# Altium PCB bldc_driver.PcbDoc
Units mm, origin at the board's own origin, x right, y up, seen from the top; angles counter-clockwise.
Board outline 60 x 50 mm, 2 copper layers (Top Layer, Bottom Layer); 14 components, 13 nets, 51 pads, 66 vias.
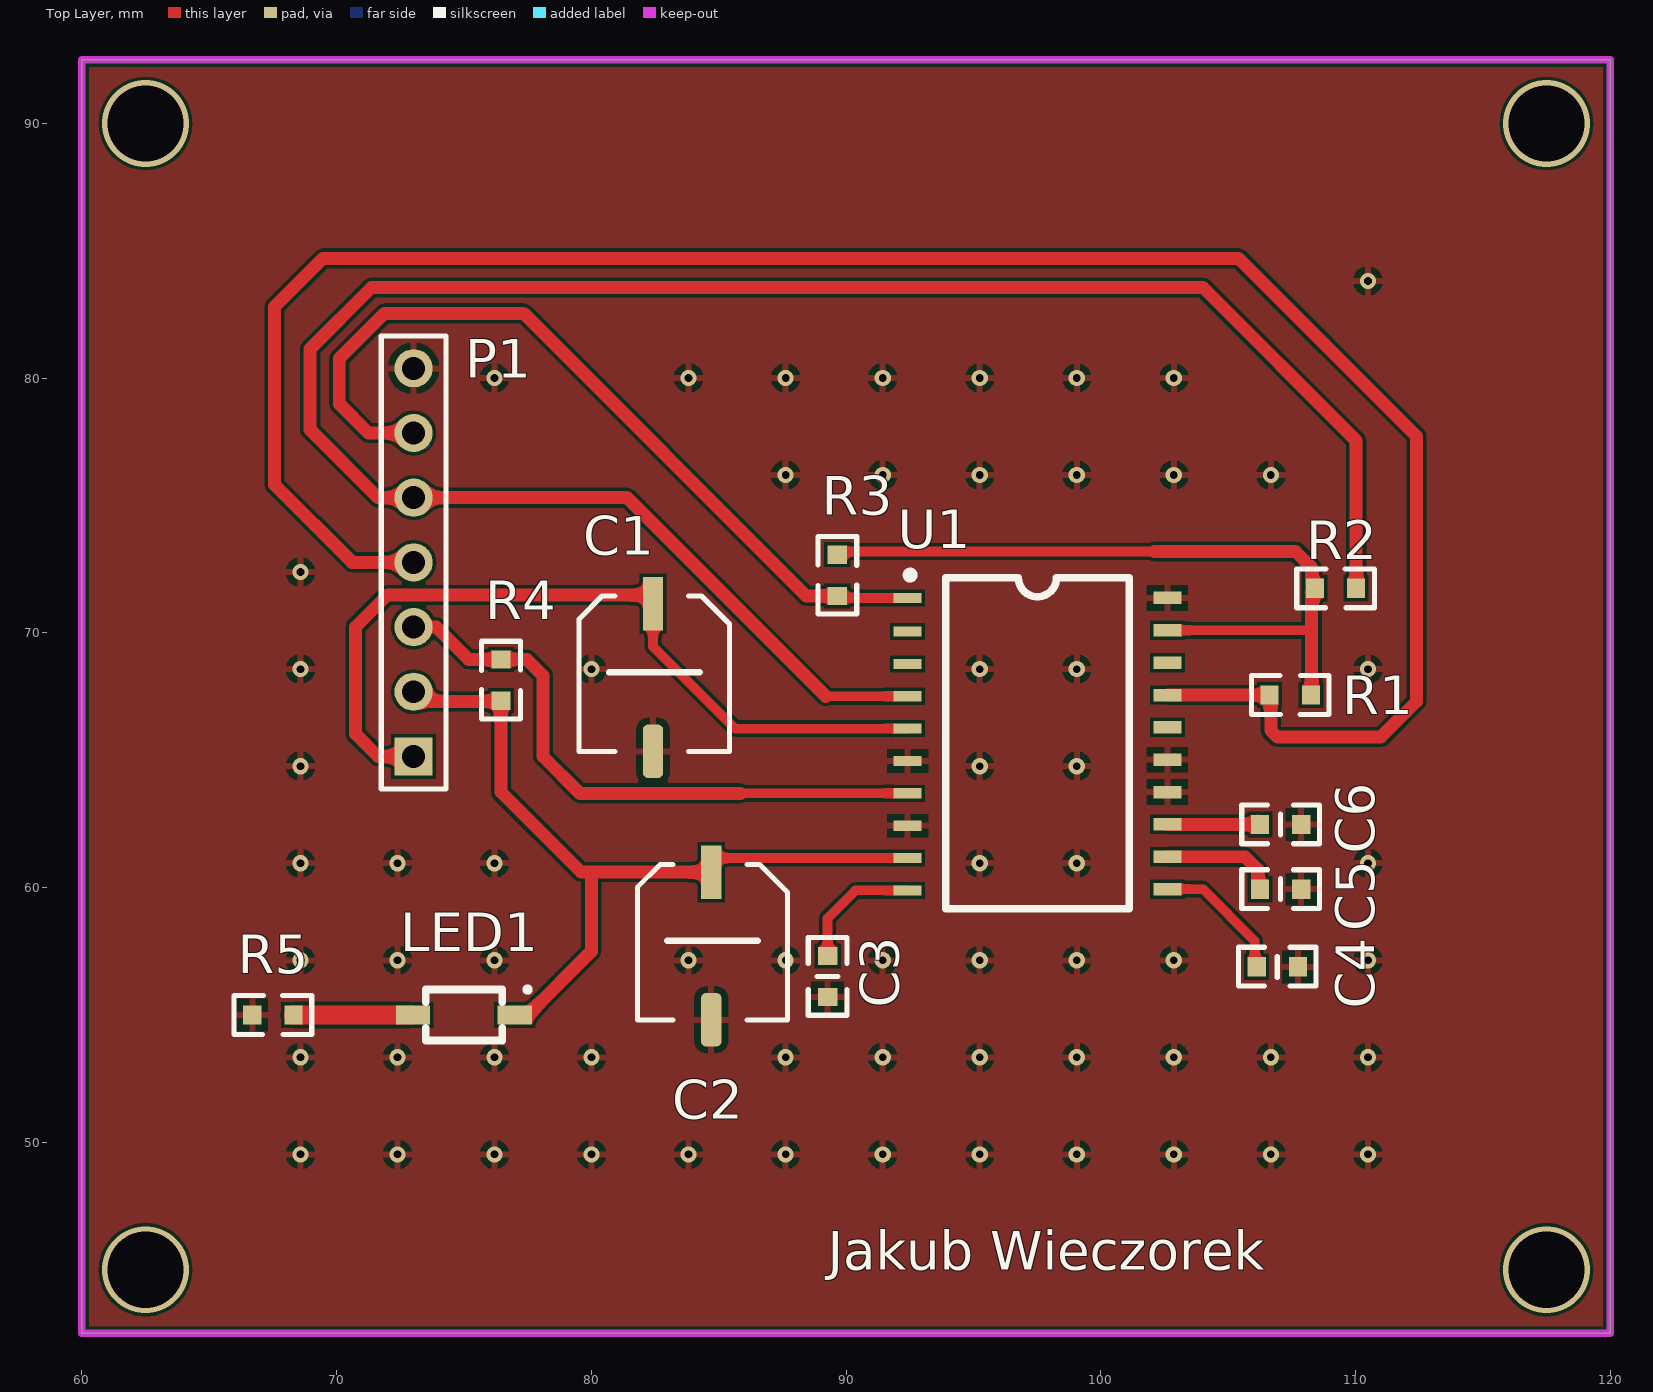
[diagram p0: Top Layer view]
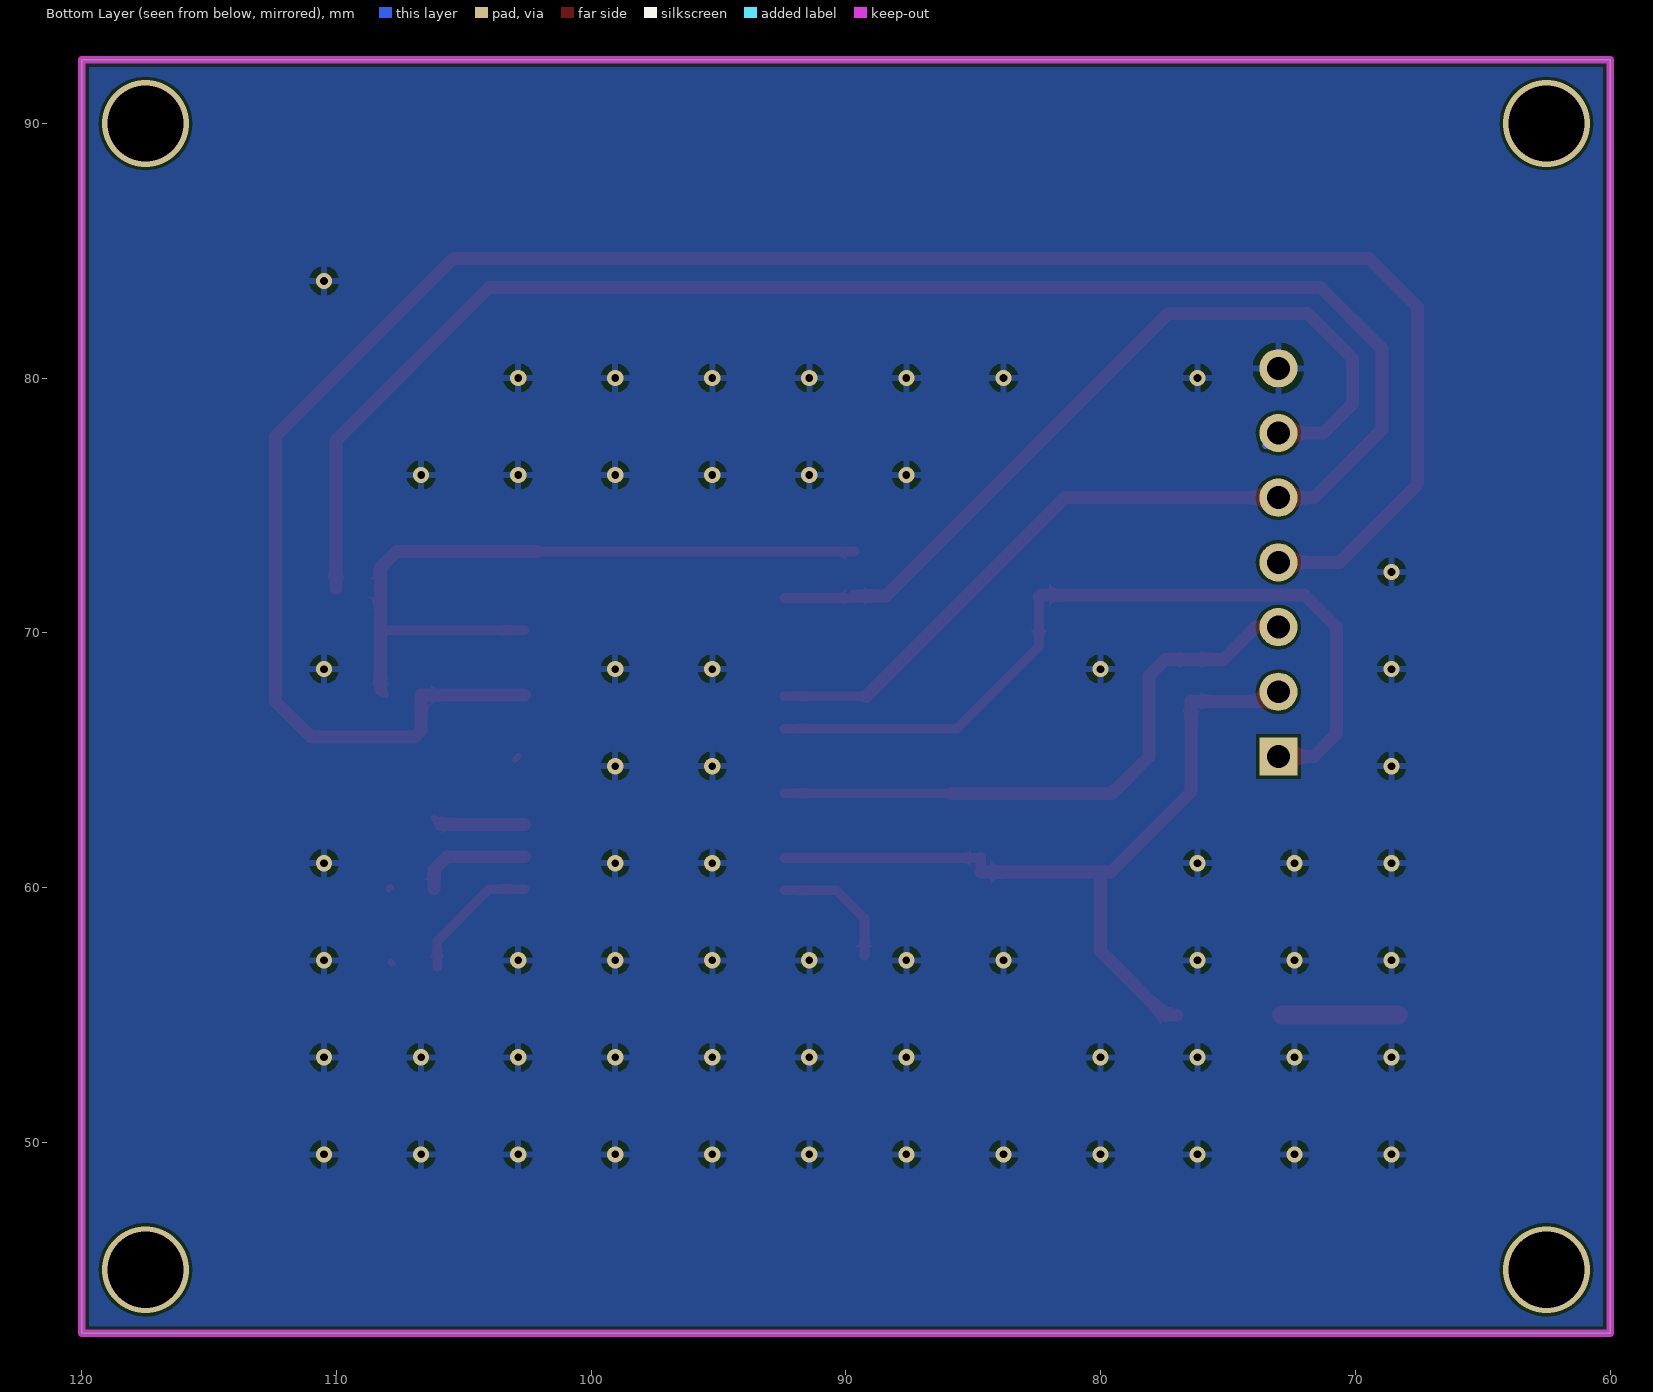
[diagram p1: Bottom Layer view, seen from below]
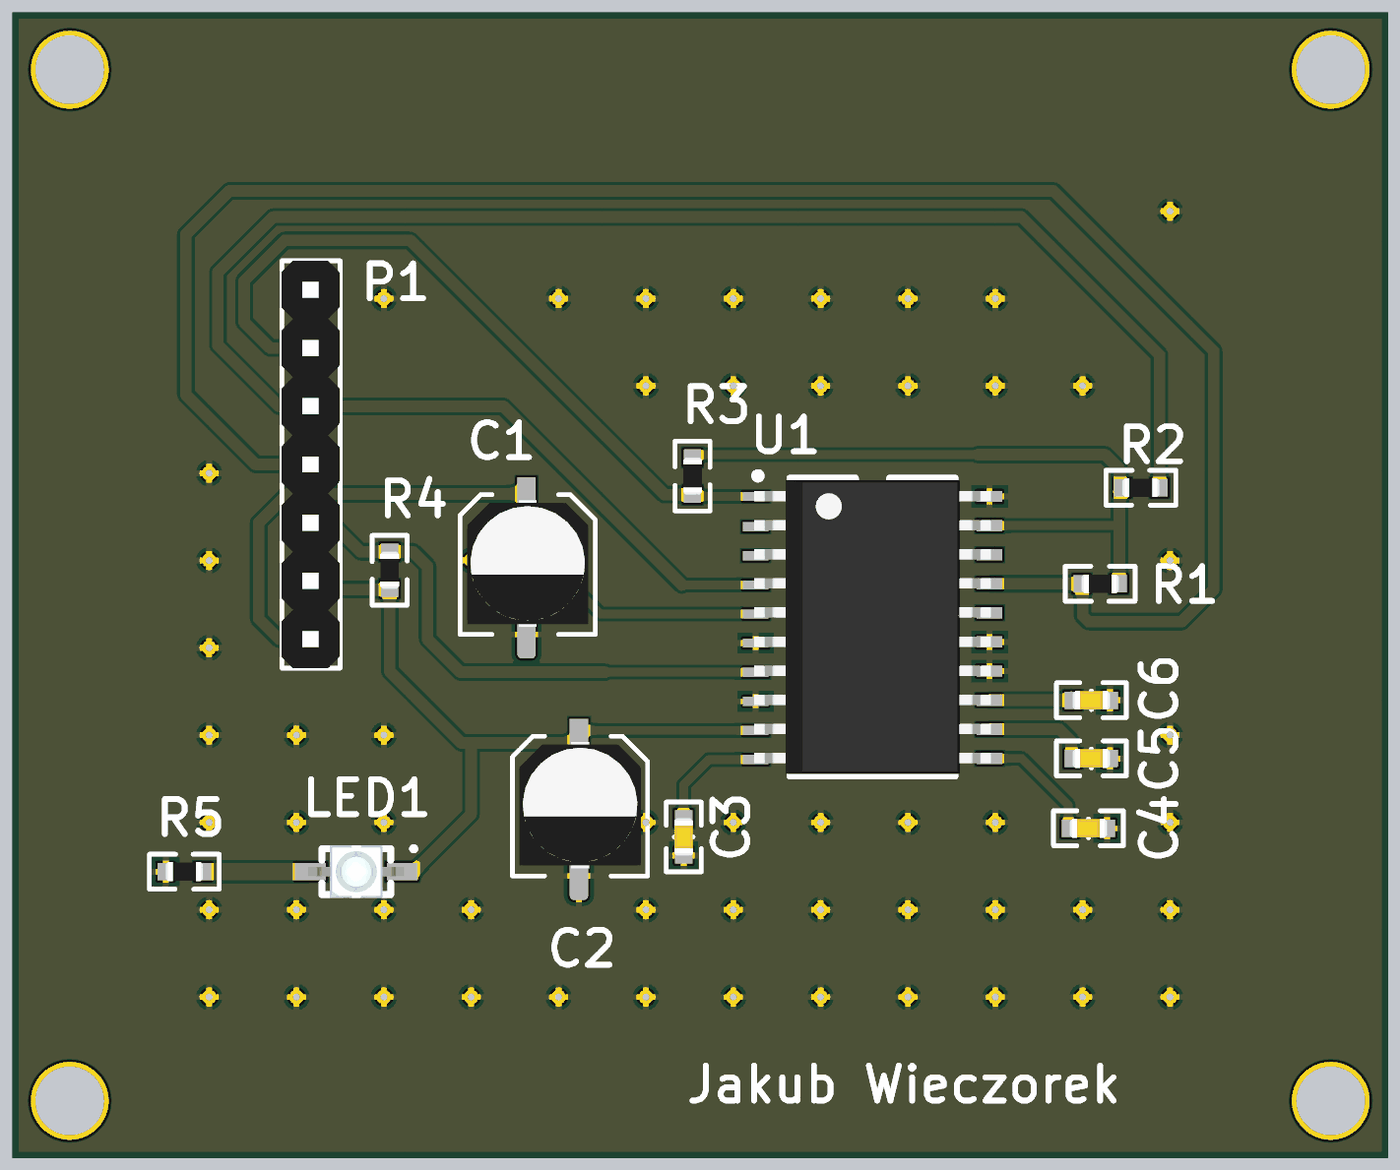
[diagram p2: 3D render of the assembled board from above, using the file's embedded part models]

## Layer stack, top to bottom
Top Solder: solder mask 0.0102, Solder Resist, Dk 3.5
Top Layer: signal copper 0.0356
Dielectric 1: dielectric 0.32, FR-4, Dk 4.8
Bottom Layer: signal copper 0.0356
Bottom Solder: solder mask 0.0102, Solder Resist, Dk 3.5

## Board outline
60,42.5 60,92.5 120,92.5 120,42.5

## Design rules (kind name [scope] priority, off if disabled: settings)
Clearance minimum_clearance [All] p1: gap=0.127 ignorepadtopadclearanceinfootprint=FALSE // minimum electrical clearance
DiffPairsRouting [All] p1: maxlimit=2.54 minlimit=0.127 mostfreqgap=0.254 toplayer_minwidth=0.127 toplayer_maxwidth=2.54 toplayer_prefwidth=0.762 bottomlayer_minwidth=0.127 bottomlayer_maxwidth=2.54 bottomlayer_prefwidth=0.762 maxuncoupledlength=12.7
HoleSize [All] p1: absolutevalues=TRUE maxlimit=6.5 minlimit=0.3 maxpercent=80.000 minpercent=20.000
MinimumAnnularRing [All] p1: minimumring=0.153
PolygonConnect [All] p1: connectstyle=Relief reliefconductorwidth=0.254 reliefentries=4 polygonreliefangle="90 Angle" airgapwidth=0.254
RoutingVias [All] p1: holewidth=1 width=1.45 viastyle="Through Hole" minholewidth=0.3 minwidth=0.45 maxholewidth=5 maxwidth=5.45
SilkToSilkClearance [All] p1: silktosilkclearance=0.125
SilkToSolderMaskClearance [IsPad] p1: minsilkscreentomaskgap=0.125 clearancetoexposedcopper=TRUE
SolderMaskExpansion [All] p1: expansion=0.102
UnRoutedNet [All] p1: checkbadconnections=TRUE
Width [All] p1: maxlimit=2.54 minlimit=0.127 preferedwidth=0.762 minimp=50.000000 maximp=50.000000 favimp=50.000000
25 further rules are at their usual default settings.

## Components (designator, comment, footprint, x,y, rotation, side; value= is the part's Value field where it differs from the comment)
C1 "10uF" Con_SMD_5x5.5 82.423,68.453 r0 top
C2 "10uF" Con_SMD_5x5.5 84.709,57.912 r0 top
C3 "Cap" 0603_CAP 89.281,56.515 r90 top value=18nF
C4 "Cap" 0603_CAP 106.934,56.896 r180 top value=18nF
C5 "Cap" 0603_CAP 107.061,59.944 r180 top value=200nF
C6 "Cap" 0603_CAP 107.061,62.484 r180 top value=10nF
LED1 "RED" VSMB2020X01 75,55 r180 top
P1 "HDR1X7" HDR1X7 73.025,65.151 r90 top
R1 "47k" 0603_RES 107.442,67.564 r180 top
R2 "47k" 0603_RES 109.22,71.755 r0 top
R3 "47k" 0603_RES 89.662,72.263 r270 top
R4 "10k" 0603_RES 76.454,68.151 r90 top
R5 "100" 0603_RES 67.5,55 r0 top
U1 "TDA5144AT" SO20 97.516,65.674 r270 top

## Footprints (in the part's own frame and the unit in brackets; to place one, negate y for a bottom-side part, rotate by r counter-clockwise, add the part's x,y. Pads: shape width x height; smd on the part's side, far side on the other; paste and mask are expansions set on the pad)
0603_CAP [mil]
  rect 28x30 smd: 1(-31.89,0.14) 2(31.89,0.14)
  silkscreen extent -60,-30 60,30, body extent -32,-16 32,16, height 32
0603_RES [mil]
  rect 28x30 smd: 1(-31.89,0) 2(31.89,0)
  silkscreen extent -60,-30 60,30, body extent -32,-16 32,16, height 32
Con_SMD_5x5.5 [mm] "SMD electrolytic capacitor"
  rect 0.8x2.1 smd: 1(0,2.7)
  rrect50% 0.8x2.1 smd: 2(0,-3.1)
  silkscreen extent -2.9,-3.1 3,3, body extent -2.6,-2.76 2.7,2.76, height 5.81
HDR1X7 [mm] "Connector; Header; 7 Position"
  rect 1.5x1.5 hole 0.9: 1(0,0)
  round 1.5 hole 0.9: 2(2.54,0) 3(5.08,0) 4(7.62,0) 5(10.16,0) 6(12.7,0) 7(15.24,0)
  silkscreen extent -1.27,-1.27 16.51,1.27, body extent -1.27,-1.24 16.51,1.3, height 8.54
SO20 [mm] "Plastic small outline package; 20 leads; large body (SOT163-1; SO20L)."
  rect 0.4x1.1 smd: 1(-5.7,-5.1) 2(-4.38,-5.1) 3(-3.11,-5.1) 4(-1.84,-5.1) 5(-0.57,-5.1) 6(0.7,-5.1) 7(1.97,-5.1) 8(3.24,-5.1) 9(4.51,-5.1) 10(5.78,-5.1)
  rect 0.49x1.1 smd: 11(5.73,5.1) 12(4.46,5.1) 13(3.19,5.1) 14(1.92,5.1) 15(0.65,5.1) 16(-0.62,5.1) 17(-1.89,5.1) 18(-3.16,5.1) 19(-4.43,5.1) 20(-5.7,5.1)
  silkscreen extent -6.74,-5.14 6.5,3.6, body extent -6.41,-5.16 6.41,5.16, height 2.48
VSMB2020X01 [mm] "VSMB2000X01 series are infrared, 940 nm emitting diodes  in GaAlAs (DH)"
  rect 1.35x0.75 smd: 1(-2,0) 2(2,0)
  silkscreen extent -2.55,-1.05 1.5,1, body extent -2.1,-1.15 2.1,1.15, height 2.77

## Part data
C1 C2: library part Cap_Pol, "Polar capacitor"
C3 C4 C5 C6: "Ceramic capacitor"
LED1: library part LED, "Light-emitting diode", COLOR=RED
P1: "Header, 7-Pin", LatestRevisionDate=17-Jul-2002, LatestRevisionNote="Re-released for DXP Platform.", Publisher="Altium Limited"
R1 R2 R3 R4 R5: library part RES, "Resistior"
U1: library part driver_TDA5144AT, "driver TDA5144AT", ComponentLink1Description=TDA5144_data_scheet, ComponentLink1URL=.\data_sheets\TDA5144_data_sheet.pdf, ComponentLink2Description=SO-20, ComponentLink2URL=.\data_sheets\SOT163-1_data_sheet.pdf

## Via types
v1: diameter 0.635, hole 0.305, Top Layer to Bottom Layer, 62 vias
v2: diameter 3.4, hole 3, Top Layer to Bottom Layer, 4 vias

## Nets (pads, with @x,y where several pads share a name; then routed paths per layer and width w, separated by ;. In a path a pad name is that pad's centre, name@x,y a point inside that pad or via, vN(x,y) a via of type N, cw(c..) or ccw(c..) an arc to the next point about the centre after c; other vN are vias at no path point)
FG: P1.3 R4.2 U1.7 | length 24
  Top Layer w0.381: 85.85,63.704 U1.7
  Top Layer w0.508: P1.3 73.914,70.231 75.184,68.961 R4.2 77.47,68.961 78.105,68.326 78.105,65.151 79.552,63.704 85.85,63.704
GND: C1.2 C2.2 C3.1 C4.1 C5.1 C6.1 P1.7 R5.1 U1.6 U1.8 U1.14 U1.15 U1.20 | length 0.4
  Top Layer w0.254: U1.15@102.87,65.151 U1.15@102.997,65.024 ; C4.1@107.823,57.023 C4.1@107.871,57.071 ; C5.1@107.871,60.023 C5.1@107.95,59.944
  other v1: 68.58,49.53 72.39,49.53 76.2,49.53 80.01,49.53 83.82,49.53 87.63,49.53 91.44,49.53 95.25,49.53 99.06,49.53 102.87,49.53 106.68,49.53 110.49,49.53 68.58,53.34 72.39,53.34 76.2,53.34 80.01,53.34 87.63,53.34 91.44,53.34 95.25,53.34 99.06,53.34 102.87,53.34 106.68,53.34 110.49,53.34 68.58,57.15 72.39,57.15 76.2,57.15 83.82,57.15 87.63,57.15 91.44,57.15 95.25,57.15 99.06,57.15 102.87,57.15 110.49,57.15 68.58,60.96 72.39,60.96 76.2,60.96 95.25,60.96 99.06,60.96 110.49,60.96 68.58,64.77 95.25,64.77 99.06,64.77 68.58,68.58 80.01,68.58 95.25,68.58 99.06,68.58 110.49,68.58 68.58,72.39 87.63,76.2 91.44,76.2 95.25,76.2 99.06,76.2 102.87,76.2 106.68,76.2 76.2,80.01 83.82,80.01 87.63,80.01 91.44,80.01 95.25,80.01 99.06,80.01 102.87,80.01 110.49,83.82
MOT1: P1.6 R3.2 U1.1 | length 33.4
  Top Layer w0.381: R3.2@89.789,71.374 U1.1
  Top Layer w0.508: P1.6 71.247,77.851 70.104,78.994 70.104,80.772 71.882,82.55 77.343,82.55 88.44,71.453 R3.2
  Bottom Layer w0.254: P1.6 P1.6@73.533,77.343
MOT2: P1.5 R2.2 U1.4 | length 81.3
  Top Layer w0.381: 89.204,67.514 U1.4
  Top Layer w0.508: 89.204,67.514 81.407,75.311 P1.5 71.628,75.311 68.961,77.978 68.961,81.153 71.374,83.566 104.013,83.566 110.03,77.549 R2.2
MOT3: P1.4 R1.2 U1.17 | length 84.5
  Top Layer w0.508: P1.4 70.612,72.771 67.564,75.819 67.564,82.804 69.469,84.709 105.41,84.709 112.395,77.724 112.395,67.31 110.998,65.913 106.934,65.913 106.68,66.167 106.68,67.564 R1.2 U1.17
NetC3_2: C3.2 U1.10 | length 5.1
  Top Layer w0.381: C3.2 89.277,58.797 90.374,59.894 U1.10
NetC4_2: C4.2 U1.11 | length 5.3
  Top Layer w0.381: U1.11 104.013,59.944 106.045,57.912 C4.2@106.045,56.896
NetC5_2: C5.2 U1.12 | length 4.5
  Top Layer w0.508: U1.12 105.664,61.214 106.172,60.706 C5.2@106.172,59.944
NetC6_2: C6.2 U1.13 | length 3.7
  Top Layer w0.254: C6.2@105.918,62.484 C6.2@106.172,62.738
  Top Layer w0.508: U1.13 C6.2@105.918,62.484
NetLED1_2: LED1.2 R5.2 | length 4.6
  Top Layer w0.762: R5.2 LED1.2@72.9,55
NetR1_1: R1.1 R2.1 R3.1 U1.19 | length 30
  Top Layer w0.254: R1.1@108.077,67.564 R1.1@108.283,67.77 ; R2.1@108.125,71.597 108.283,71.755 R2.1
  Top Layer w0.381: R3.1@89.662,73.2 102.108,73.2 ; U1.19 108.283,70.104
  Top Layer w0.508: 102.108,73.2 107.648,73.2 108.283,72.565 108.283,71.755 108.283,70.104 R1.1@108.283,67.77
VCC: C2.1 LED1.1 P1.2 R4.1 U1.9 | length 32.1
  Top Layer w0.254: P1.2 P1.2@73.406,67.31
  Top Layer w0.381: C2.1 C2.1@84.709,61.214 ; C2.1@84.836,61.164 U1.9
  Top Layer w0.508: P1.2@73.406,67.31 R4.1@76.454,67.31 ; R4.1 R4.1@76.454,67.31 ; LED1.1 77.5,55 80,57.5 80,60.612 ; C2.1 80,60.612 ; R4.1@76.454,67.31 76.454,63.754 79.596,60.612 80,60.612
VMOT: C1.1 P1.1 U1.5 | length 32.4
  Top Layer w0.381: C1.1@82.423,71.407 C1.1 82.423,69.469 85.648,66.244 U1.5
  Top Layer w0.508: P1.1 71.628,65.151 70.739,66.04 70.739,70.231 71.997,71.489 82.341,71.489 C1.1@82.423,71.407
pads on no net: U1.2 U1.3 U1.16 U1.18
copper on no net:
  other v2: 62.5,45 117.5,45 62.5,90 117.5,90

## Polygon pours and split planes (outlines as drawn)
GND on Bottom Layer "POLY_BOTTOM1" (solid, remove dead copper, pour order 24): 60,92.5 60,42.5 120,42.5 120,92.5
GND on Top Layer "POLY_TOP1" (solid, remove dead copper, pour order 26): 60,92.5 60,42.5 120,42.5 120,92.5

## Keep-outs
Keep-Out Layer:
  the board outline again, w0.3

## Silkscreen, mask and mechanical layers (free items; w line width, h text height)
Top Overlay:
  text "Jakub Wieczorek" at 89.277,45 h1.52